# EAGLE board audiostick_1_0 (EAGLE 9.2.0)
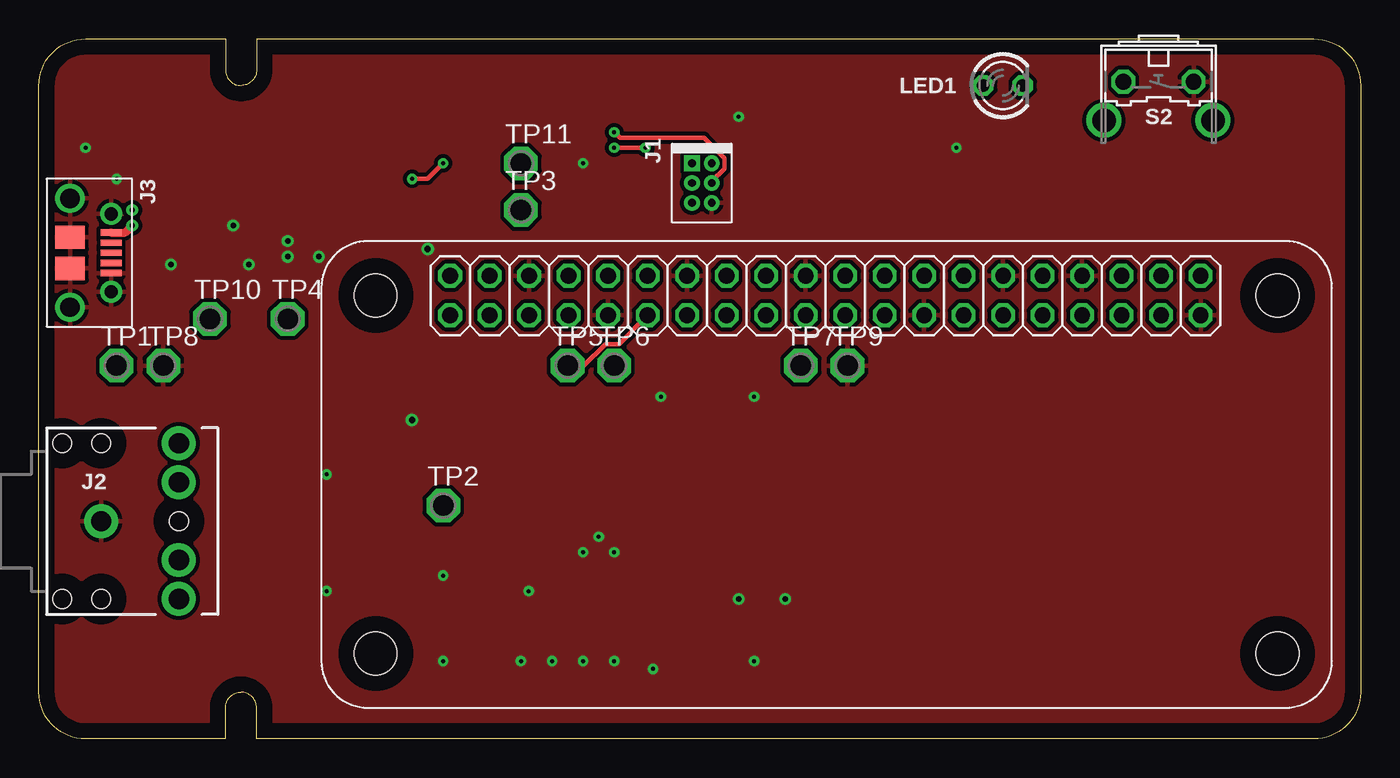
[diagram p0: board, top side]
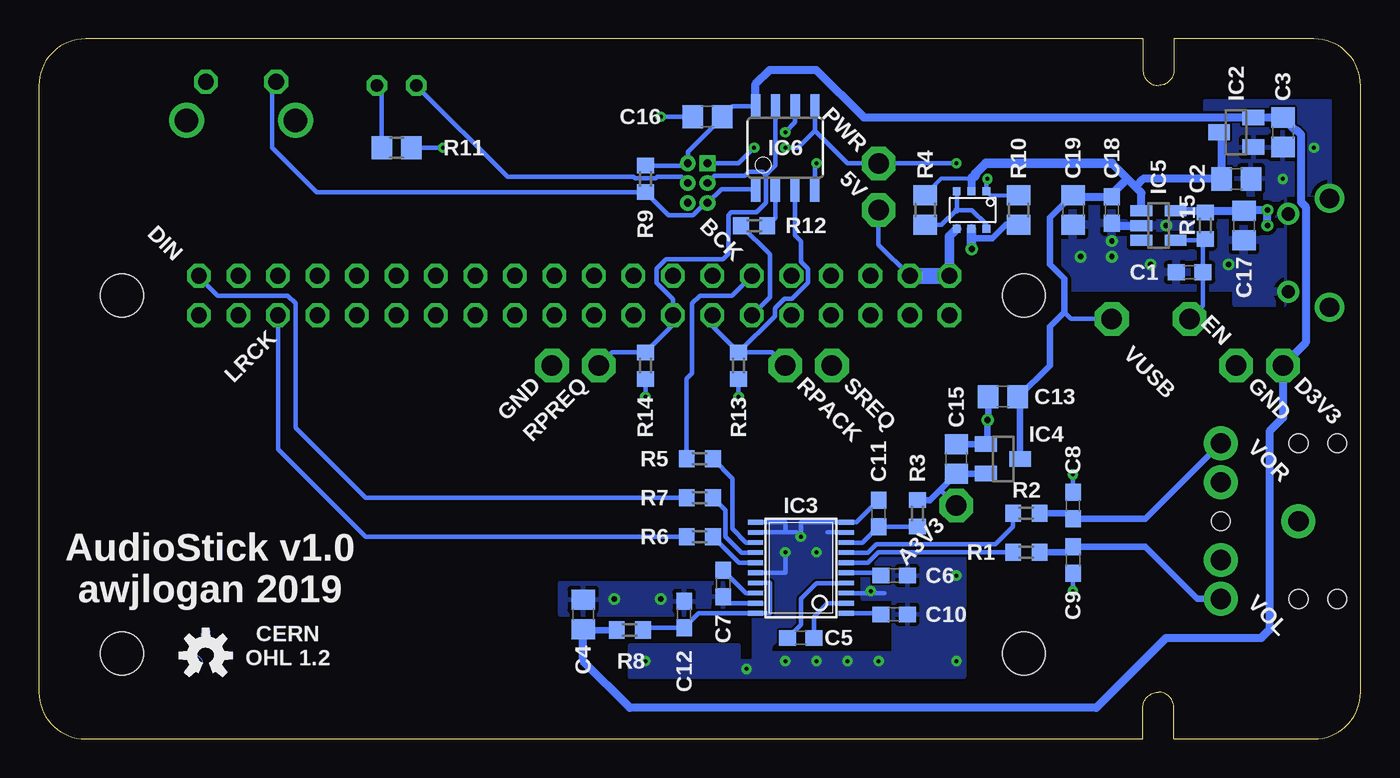
[diagram p1: board, bottom side, seen from below]

Size 85 x 45 mm. Coordinates in mm from the lower left corner, seen from the top.
Outline: 0,3 0,42 arc-90 3,45 12,45 12,43 arc90 13,42 arc90 14,43 14,45 82,45 arc-90 85,42 85,3 arc-90 82,0 14,0 14,2 arc90 13,3 arc90 12,2 12,0 3,0 arc-90 0,3
Copper layers (1*16): Top 0.035mm / dielectric 1.5mm / Bottom 0.035mm
Design rules "default *": minimum track width 6mil, minimum drill 10mil, track to track 6mil, track to pad 6mil, pad to pad 6mil, via to via 6mil, smd to smd 6mil, copper to edge 40mil, drill to drill 6mil, minimum pad ring 10mil, minimum via ring 8mil, stop-mask expansion 4mil, vias tented up to drill 0mil, thermal gap 10mil

## Footprints (pad centres in the part's own frame; a part is rotated, then mirrored left to right if it is on the bottom)
C0603 = smd 1.1 x 1: 1 -0.85,0; 2 0.85,0
C0805 = smd 1.3 x 1.5: 1 -0.95,0; 2 0.95,0
SOT-23 = smd 1 x 1.4: 1 -0.95,-1.1; 2 0.95,-1.1; 3 0,1.1
TSSOP20 = smd 0.305 x 0.991: 1 -2.925,-2.918; 2 -2.275,-2.918; 3 -1.625,-2.918; 4 -0.975,-2.918; 5 -0.325,-2.918; 6 0.325,-2.918; 7 0.975,-2.918; 8 1.625,-2.918; 9 2.275,-2.918; 10 2.925,-2.918; 11 2.925,2.918; 12 2.275,2.918; 13 1.625,2.918; 14 0.975,2.918; 15 0.325,2.918; 16 -0.325,2.918; 17 -0.975,2.918; 18 -1.625,2.918; 19 -2.275,2.918; 20 -2.925,2.918
GHI_SOT23-5 = smd 0.7 x 1.4: 1 0.95,1.1; 2 0,1.1; 3 -0.95,1.1; 4 -0.95,-1.1; 5 0.95,-1.1
8S1 = smd 0.6 x 1.6: 1 -1.905,-2.654; 2 -0.645,-2.654; 3 0.625,-2.654; 4 1.895,-2.654; 5 1.905,2.654; 6 0.635,2.654; 7 -0.635,2.654; 8 -1.905,2.654
2X3-50MIL = drill 0.5 square: 1 0,0 | drill 0.5: 2 0,1.27; 3 1.27,0; 4 1.27,1.27; 5 2.54,0; 6 2.54,1.27
AUDIO-JACK = drill 1.3 pad 2.184: RING 5,5; RSH 5,2.5; SLEEVE 0,0; TIP 5,-5; TSH 5,-2.5 | hole 1.2: 0,5; -2.5,5; -2.5,-5; 0,-5; 5,0
1050170001 = smd 0.4 x 1.35: D+ 3.75,4.15; D- 3.1,4.15; GND 5.05,4.15; ID 4.4,4.15; VBUS 2.45,4.15 | smd 1.5 x 1.9: P$1 2.75,1.5; P$2 4.75,1.5 | drill 0.85 pad 1.422: P$3 1.25,4.15; P$4 6.25,4.15 | drill 1.25: P$10 0.25,1.5; P$11 7.25,1.5
LED3MM = drill 0.813 octagon: A -1.27,0; K 1.27,0
6TSOP = smd 0.5 x 0.5: 1 -0.925,-1.2; 2 0.025,-1.2; 3 0.975,-1.2; 4 0.975,1.2; 5 0.025,1.2; 6 -0.925,1.2
R0603 = smd 1 x 1.1: 1 -0.85,0; 2 0.85,0
R0805 = smd 1.3 x 1.5: 1 -0.95,0; 2 0.95,0
B3F-31XX = drill 1.016 octagon: 1 -2.261,-1.245; 2 2.261,-1.245 | drill 1.499 pad 2.159: 3 -3.505,1.245; 4 3.505,1.245
P1-13 = drill 1.321 pad 2.159 octagon: TP 0,0
RASPIZERO = drill 1.016 octagon: 1 8.288,25.23; 2 8.288,27.77; 3 10.828,25.23; 4 10.828,27.77; 5 13.368,25.23; 6 13.368,27.77; 7 15.908,25.23; 8 15.908,27.77; 9 18.448,25.23; 10 18.448,27.77; 11 20.988,25.23; 12 20.988,27.77; 13 23.528,25.23; 14 23.528,27.77; 15 26.068,25.23; 16 26.068,27.77; 17 28.608,25.23; 18 28.608,27.77; 19 31.148,25.23; 20 31.148,27.77; 21 33.688,25.23; 22 33.688,27.77; 23 36.228,25.23; 24 36.228,27.77; 25 38.768,25.23; 26 38.768,27.77; 27 41.308,25.23; 28 41.308,27.77; 29 43.848,25.23; 30 43.848,27.77; 31 46.388,25.23; 32 46.388,27.77; 33 48.928,25.23; 34 48.928,27.77; 35 51.468,25.23; 36 51.468,27.77; 37 54.008,25.23; 38 54.008,27.77; 39 56.548,25.23; 40 56.548,27.77 | hole 2.75: 3.5,26.5; 61.5,26.5; 3.5,3.5; 61.5,3.5

## Placement (x,y rotation side)
C1  2n2  [C0603]  11,30 180 bottom
C2  100n  [C0805]  8,36 0 bottom
C3  1u  [C0805]  5,39 270 bottom
C4  10n  [C0805]  50,8 90 bottom
C5  2u2  [C0603]  36,6.5 0 bottom
C6  2u2  [C0603]  30,10.5 0 bottom
C7  100n  [C0603]  41,10 270 bottom
C8  2n2  [C0603]  18.5,15 90 bottom
C9  2n2  [C0603]  18.5,11.5 270 bottom
C10  100n  [C0603]  30,8 0 bottom
C11  100n  [C0603]  31,14.5 90 bottom
C12  100n  [C0603]  43.5,8 90 bottom
C13  100n  [C0805]  23,22 180 bottom
C15  1u  [C0805]  26,18 90 bottom
C16  10n  [C0805]  42,40 180 bottom
C17  1u  [C0805]  7.5,33 270 bottom
C18  100n  [C0603]  16,34 270 bottom
C19  10u  [C0805]  18.5,34 270 bottom
IC2  [SOT-23]  8,39 90 bottom
IC3  PCM5102ASW  [TSSOP20]  36,11 90 bottom
IC4  [SOT-23]  23,18 270 bottom
IC5  AP22804W5  [GHI_SOT23-5]  13,33 90 bottom
IC6  TINY13V-10SSU  [8S1]  37,38 0 bottom
J1  AVRISP6TH127  [2X3-50MIL]  42,37 270 top
J2  AUDIO_JACK_3.5MM_PTH  [AUDIO-JACK]  4,14 0 top
J3  USB-B  [1050170001]  0.5,35 270 top
LED1  [LED3MM]  62,42 0 top
Q2  [6TSOP]  25,34 180 bottom
R1  470R  [R0603]  21.5,12 0 bottom
R2  470R  [R0603]  21.5,14.5 0 bottom
R3  F  [R0603]  28.5,14.5 90 bottom
R4  100K  [R0805]  28,34 270 bottom
R5  22R  [R0603]  42.5,18 0 bottom
R6  22R  [R0603]  42.5,13 0 bottom
R7  22R  [R0603]  42.5,15.5 0 bottom
R8  F  [R0603]  47,7 180 bottom
R9  10K  [R0603]  46,36 90 bottom
R10  100K  [R0805]  22,34 90 bottom
R11  180R  [R0805]  62,38 180 bottom
R12  22R  [R0603]  39,33 180 bottom
R13  10K  [R0603]  40,24 90 bottom
R14  10K  [R0603]  46,24 90 bottom
R15  10K  [R0603]  10,33 90 bottom
S2  [B3F-31XX]  72,41 180 top
TP1  PTR1PAD1-13  [P1-13]  5,24 0 top
TP2  PTR1PAD1-13  [P1-13]  26,15 0 top
TP3  PTR1PAD1-13  [P1-13]  31,34 0 top
TP4  PTR1PAD1-13  [P1-13]  16,27 0 top
TP5  PTR1PAD1-13  [P1-13]  34,24 0 top
TP6  PTR1PAD1-13  [P1-13]  37,24 0 top
TP7  PTR1PAD1-13  [P1-13]  49,24 0 top
TP8  PTR1PAD1-13  [P1-13]  8,24 0 top
TP9  PTR1PAD1-13  [P1-13]  52,24 0 top
TP10  PTR1PAD1-13  [P1-13]  11,27 0 top
TP11  PTR1PAD1-13  [P1-13]  31,37 0 top
U$1  RASPIZERO  [RASPIZERO]  18.16,2 0 top

## Library data of the parts
C1-C13 C15-C19 = rcl; SPICEPREFIX: C
IC2 IC4 J1 J3 Q2 U$1 = AWJLEagleLib
IC3 IC5 = AudioStick
IC6 = atmel; MPN: ATTINY13V-10SSU; OC_FARNELL: 1455135; OC_NEWARK: 58M3773
J2 = SparkFun-Connectors; PROD_ID: CONN-08774; SF_ID: PRT-08032
LED1 = led
R1-R15 = rcl; SPICEPREFIX: R
S2 = switch-omron; MPN: B3F-3100; OC_FARNELL: 959704; OC_NEWARK: 36M3582
TP1-TP11 = testpad

## Nets
!RST: IC6.1 J1.5 R9.1 S2.2
+3V3: C3.1 C4.1 C16.1 IC2.2 IC6.8 J1.2 R8.2 R9.2 TP1.TP
+5V: C2.1 C13.1 C18.1 C19.1 IC2.3 IC4.3 IC5.1 Q2.2 R4.1 TP4.TP
+5V/1: Q2.4 TP3.TP U$1.2 U$1.4
BCK: R5.1 U$1.12
DIN: R7.1 U$1.40
GND: C1.2 C2.2 C3.2 C4.2 C6.2 C7.2 C8.2 C9.2 C10.2 C11.2 C12.2 C13.2 C15.2 C16.2 C17.2 C18.2 C19.2 IC2.1 IC3.3 IC3.9 IC3.10 IC3.11 IC3.12 IC3.16 IC3.19 IC4.1 IC5.2 IC6.4 J1.6 J2.SLEEVE J3.GND J3.P$1 J3.P$2 J3.P$3 J3.P$4 J3.P$10 J3.P$11 Q2.5 R10.1 R11.1 R13.1 R14.1 S2.1 TP8.TP TP9.TP U$1.6 U$1.9 U$1.14 U$1.20 U$1.25 U$1.30 U$1.34 U$1.39
IN_EN: C1.1 IC5.4 R15.1 TP10.TP
LED: IC6.6 J1.4 LED1.A
LRCK: R6.1 U$1.35
N$1: C5.1 IC3.4
N$2: C5.2 IC3.2
N$3: C6.1 IC3.5
N$4: C7.1 IC3.18
N$5: IC3.6 R1.1
N$6: Q2.3 Q2.6 R4.2
N$7: C10.1 IC3.1
N$8: IC3.7 R2.1
N$9: IC3.13 R5.2
N$10: IC3.15 R6.2
N$11: IC3.14 R7.2
N$12: C12.1 IC3.17 IC3.20 R8.1
N$14: C11.1 IC3.8 R3.1
N$15: LED1.K R11.2
PWR: IC6.5 J1.1 Q2.1 R10.2 TP11.TP
RP_ACK: IC6.3 R13.2 TP6.TP U$1.13
RP_REQ: IC6.7 J1.3 R14.2 TP7.TP U$1.15
S_REQ: IC6.2 R12.1
S_REQ': R12.2 TP5.TP U$1.11
V+: C17.1 IC5.5 J3.VBUS R15.2
VCCINT: C15.1 IC4.2 R3.2 TP2.TP
VOL: C9.1 J2.TIP R1.2
VOR: C8.1 J2.RING R2.2

## Tracks (layer width: path | path; a pad name or v marks a point on that pad's centre or on a via)
!RST
  Bottom 0.305: IC6.1 41.11,35.35 J1.5 42.13,34.46 42.94,33.65 44.5,33.65 R9.1 67.15,35.15 70,38 70,41.98 S2.2
+3V3
  Bottom 0.305: IC6.8 40.4,40.65 C16.1 41.05,39.95 43.27,37.73 J1.2 43.42,36.85 R9.2
  Bottom 0.406: C4.1 49.95,7 R8.2
  Bottom 0.508: C4.1 50,5 47,2 17,2 12.5,6.5 6.38,6.5 5.87,7.01 5.87,19.77 5,20.64 TP1.TP 3.53,25.47 3.53,34.21 3.84,34.52 3.84,38.87 4.08,39.11 4.16,39.11 C3.1 IC2.2 31.95,39.95 35.01,43.01 38,43.01 38.91,42.11 IC6.8
+5V
  Bottom 0.254: 25.02,36 27,36 28,35 R4.1
  Bottom 0.305: TP4.TP 18.64,27 19.07,27.43
  Bottom 0.406: IC4.3 21.9,21.85 C13.1 22,22 20,24 20,26.49 19.07,27.43 19.07,29.57 20,30.51 20,33.5 18.55,34.95 C19.1
  Bottom 0.508: IC5.1 14.1,35.1 14.5,35.5 | 14.5,35.5 15,36 | 25.02,36 Q2.2 | C19.1 18.4,34.85 C18.1 16,35 15,36 | IC2.3 8.95,38.85 C2.1 14,36 14.5,35.5 | 15,36 16,37
  Bottom 0.61: 25.02,36 24.79,36.24 24.79,36.33 24.11,37 16,37
+5V/1
  Bottom 0.305: U$1.4 31,31.78 TP3.TP
  Bottom 0.61: Q2.4 26.45,32.33 U$1.2
  Bottom 1.016: U$1.4 U$1.2
BCK
  Bottom 0.305: R5.1 43.35,23.15 43,23.5 43,28 42.5,28.5 40.42,28.5 U$1.12
DIN
  Bottom 0.305: U$1.40 74.71,29.71 73.5,28.5 69,28.5 68.5,28 68.5,20 64,15.5 R7.1
GND  (via drill 0.25, 0.35, 0.4)
  Bottom 0.305: C7.2 40.58,8.72 IC3.19 | 30.62,9.38 IC3.3 31.5,9.38 v31.5,9.5 | IC3.12 37,13.28 | 37,13.28 36.27,13.28 v36,13 36,13.93 IC3.10 | v18.5,17 C8.2 | C9.2 v18.5,9.5 | 34.27,13.28 IC3.9 | 34.92,13.93 IC3.10 | IC3.10 32.42,13.93 C11.2 | R13.1 v40,22 | R14.1 v46,22 | R11.1 v59,38 | v35,37 35.1,36.9 IC6.4 | v45,40 C16.2 | 38.08,13.93 IC3.11 37,13.93 37,13.28 | IC3.16 37,10.68 v37,12
  Bottom 0.406: R10.1 22.82,33.05 23.68,32.19 24.86,32.19 25.02,32.02 | C15.2 IC4.1 24,19.05 v24,20.5 23.95,20.55 C13.2
  Bottom 0.508: C18.2 15.85,33 IC5.2
  Bottom 0.61: Q2.5 25.02,32.02 25.02,31.52 v25,31.5
  other vias: 45,9 35,12 26,5 26,10.5 31,5 33,5 35,5 37,5 39.5,4.5 46,5 16,31 16,32 12.5,33 18,31 13.5,30.5 8.5,30.5 3,38 5,36 48,9
  pour Top (isolate 0.254): 0,0 0,45 85,45 85,0
  pour Bottom: 41,10 41,8 51.5,8 51.5,10
  pour Bottom: 47,4 25.5,4 25.5,12 32,12 32,9 30,9 30,5.5 38,5.5 38,6 34,10 34,14 38,14 38,9 39,8 39,5 40,5 40,6 47,6
  pour Bottom (isolate 0.254): 19,35 5,35 5,28 8,28 8,29 19,29
  pour Bottom: 2,41 10,41 10,35 2,35
IN_EN
  Bottom 0.305: IC5.4 10.1,32.05 | 10.1,32.05 R15.1 | TP10.TP 10.15,27.85 C1.1 10.15,32 10.1,32.05
LED  (via drill 0.25)
  Top 0.305: v37,39 37.37,38.63 42.78,38.63 44.08,37.34 44.08,36.66 43.27,35.86 J1.4
  Bottom 0.305: v37,39 36.37,39.63 IC6.6 | LED1.A 54.87,36.13 46.77,36.13 46.68,36.05 45.32,36.05 45.23,36.13 43.67,36.13 J1.4
LRCK
  Bottom 0.305: R6.1 64,13 69.63,18.63 U$1.35
N$1
  Bottom 0.305: IC3.4 33.11,10 35,10 36,9 36,7.35 C5.1
N$2
  Bottom 0.305: IC3.2 34.27,8.72 35.15,7.85 C5.2
N$3
  Bottom 0.305: C6.1 31.02,10.68 IC3.5
N$4
  Bottom 0.305: IC3.18 39.52,9.38 C7.1
N$5
  Bottom 0.305: IC3.6 31.68,11.32 31,12 R1.1
N$6
  Bottom 0.254: 25.98,34.02 26.95,33.05 | 25,34 25.95,34
  Bottom 0.305: Q2.6 24.07,33.08 25,34 26,34 26.95,33.05 R4.2 | 25.98,34.02 Q2.3
  Bottom 0.406: 25.98,34.02 25.95,34
N$7
  Bottom 0.305: C10.1 30.93,8.07 IC3.1
N$8
  Bottom 0.305: IC3.7 31.67,11.97 31.15,12.5 23.5,12.5 22.35,13.65 R2.1
N$9
  Bottom 0.305: R5.2 40.39,16.74 40.39,13.5 39.51,12.62 IC3.13
N$10
  Bottom 0.305: R6.2 39.98,11.32 IC3.15
N$11
  Bottom 0.305: R7.2 40.84,14.7 40.84,13 39.82,11.97 IC3.14
N$12
  Bottom 0.305: R8.1 46,7.15 C12.1 42.58,8.07 IC3.20 38,8.07 38,10.03 IC3.17
N$13
  Bottom 0.01: 73.81,4.25 arc-10 73.63,4.34 73.19,3.99 72.89,4.29 73.25,4.73 arc-19 73.1,5.09 72.53,5.15 72.53,5.58 73.1,5.64 arc19 73.25,6 72.89,6.44 73.19,6.74 73.63,6.38 arc19 74,6.54 74.06,7.1 74.48,7.1 74.54,6.54 arc19 74.91,6.38 75.35,6.74 75.65,6.44 75.29,6 arc19 75.44,5.64 76.01,5.58 76.01,5.15 75.44,5.09 arc-19 75.29,4.73 75.65,4.29 75.35,3.99 74.91,4.34 arc-10 74.73,4.25 74.48,4.86 arc-67 74.82,5.37 arc247 74.06,4.86 73.81,4.25
N$14
  Bottom 0.305: IC3.8 32.02,12.62 C11.1 R3.1
N$15
  Bottom 0.305: LED1.K 62.95,41.68 R11.2
PWR  (via drill 0.25)
  Top 0.305: v24,36 25,36 v26,37 | v37,38 v39,38
  Bottom 0.254: Q2.1 23.82,34.95 R10.2
  Bottom 0.305: Q2.1 24.07,35.92 v24,36 | 35.09,39.09 IC6.5 | 35.09,39.09 33,37 TP11.TP v26,37 | J1.1 40,37 v39,38 | v37,38 36.19,38 35.09,39.09
RP_ACK
  Bottom 0.305: R13.2 37.67,27.18 37.67,27.67 37.05,28.3 36.57,28.3 35.54,29.33 35.54,30.21 36,30.67 36,32 36.38,32.38 IC6.3 | R13.2 37.85,24.85 TP6.TP | R13.2 41.69,26.54 U$1.13
RP_REQ
  Bottom 0.305: IC6.7 37.63,36.89 38.25,36.27 | 38.25,36.27 38.25,34.47 38.87,33.85 40.48,33.85 40.66,33.68 40.66,31.18 41,30.84 44.67,30.84 45.3,30.21 45.3,29.33 44.23,28.26 U$1.15 44.23,26.62 R14.2 48.15,24.85 TP7.TP | J1.3 41.54,36.19 39.59,36.19 39.33,36.45 38.48,36.45 38.3,36.27 38.25,36.27
S_REQ
  Bottom 0.305: R12.1 37.65,33.51 IC6.2
S_REQ'
  Top 0.305: U$1.11 37.3,25.38 36.43,25.38 35.04,24 TP5.TP
  Bottom 0.305: U$1.11 38,28.38 38,31.15 R12.2
V+  (via drill 0.35)
  Top 0.508: J3.VBUS 5.55,32.55 v6,33
  Bottom 0.305: R15.2 10.15,34 11.85,34
  Bottom 0.508: 11.85,34 IC5.5 C17.1 7.45,34 v6,34 v6,33
VCCINT
  Bottom 0.305: TP2.TP 27.02,16.02
  Bottom 0.406: IC4.2 C15.1 27.02,16.02 27.7,15.35 R3.2
VOL
  Bottom 0.305: 18.85,12 C9.1
  Bottom 0.406: R1.2 18.85,12 | C9.1 13.85,12.35 10.5,9 J2.TIP
VOR
  Bottom 0.305: 18.85,14.5 C8.1
  Bottom 0.406: R2.2 18.85,14.5 | C8.1 13.85,14.15 J2.RING

## Text on the board
bNames: PWR | 5V | BCK | DIN | EN | LRCK | VUSB | D3V3 | GND | SREQ | RPACK | RPREQ | GND | VOR | A3V3 | AudioStick v1.0 / awjlogan 2019 | VOL | CERN / OHL 1.2